# EAGLE board boardEagle (EAGLE 6.4)
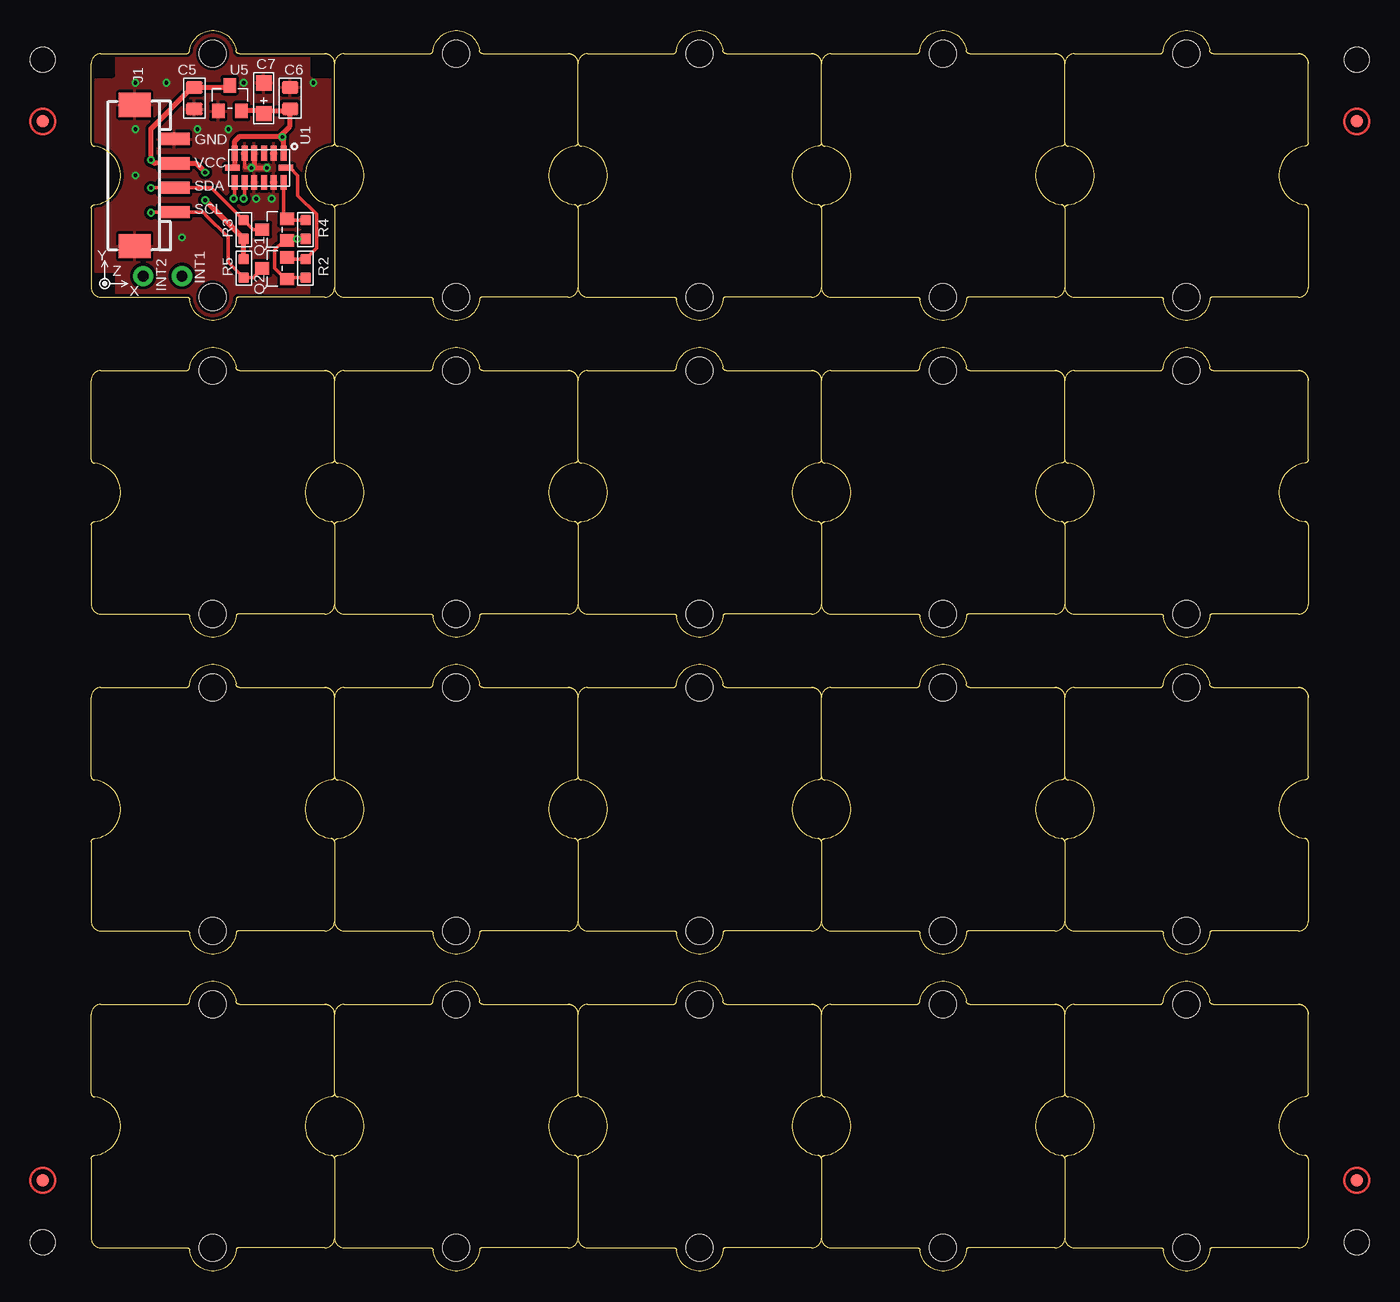
[diagram p0: board, top side]
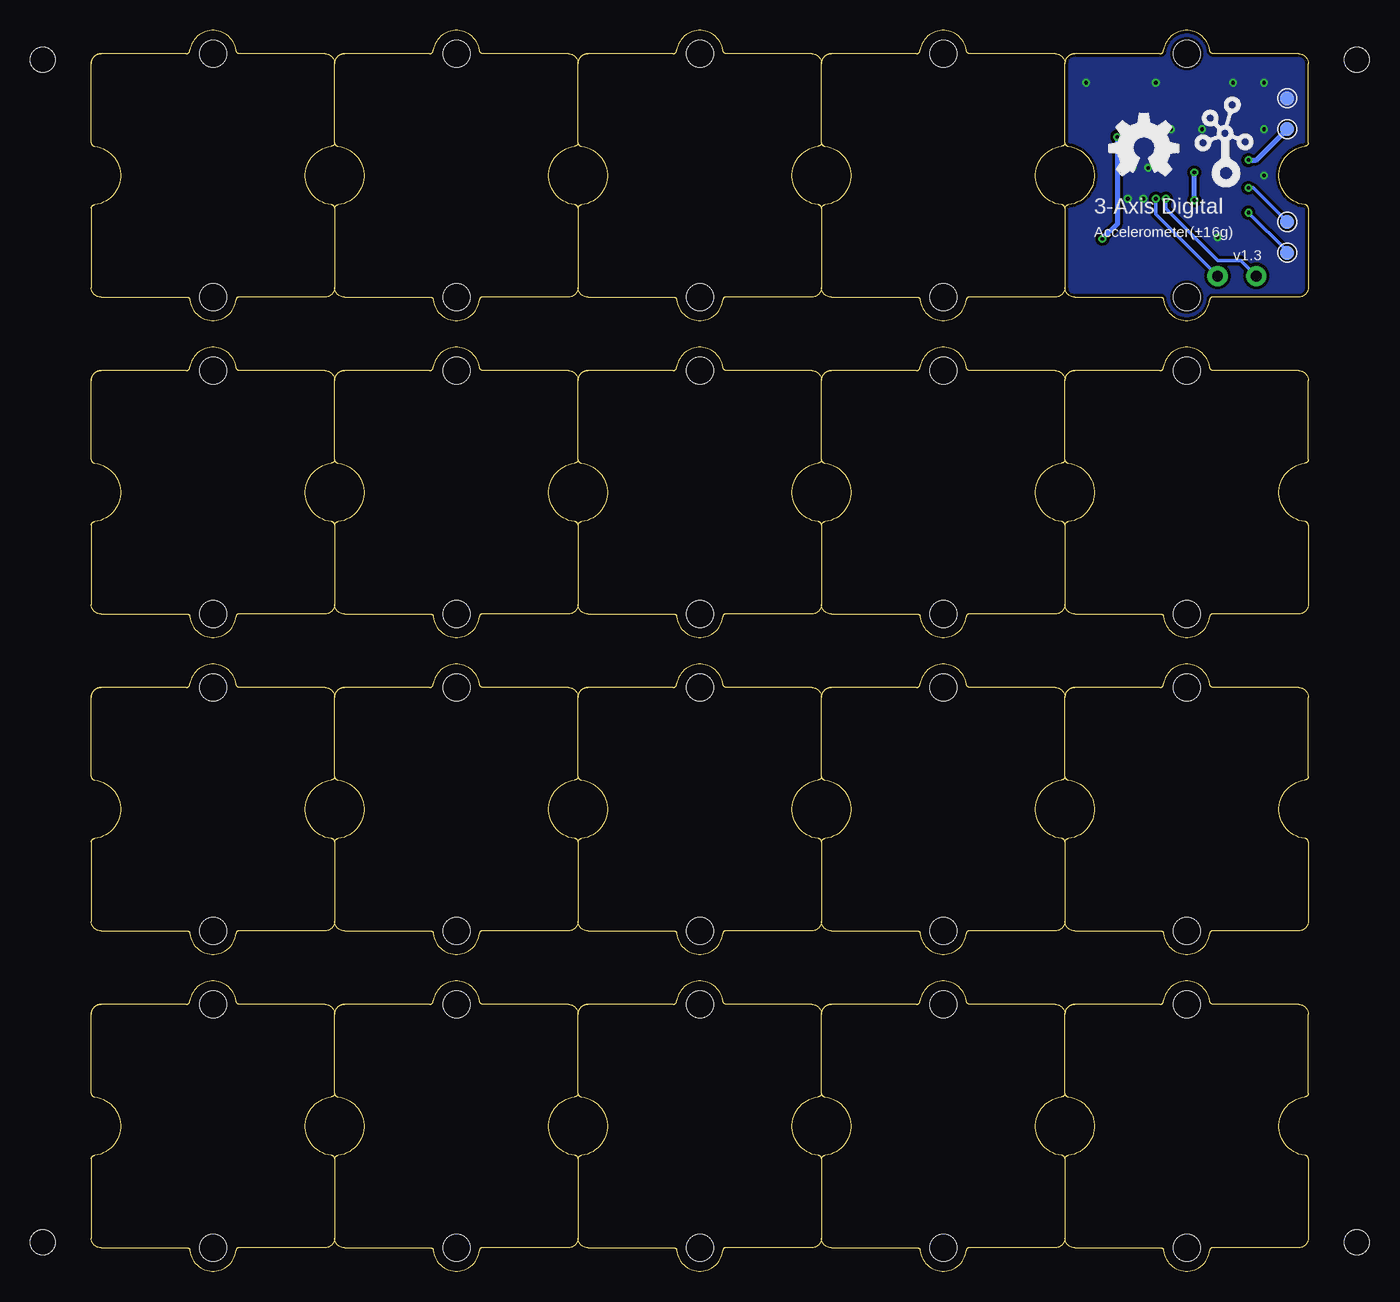
[diagram p1: board, bottom side, seen from below]

Size 100 x 101.93 mm. Coordinates in mm from the lower left corner, seen from the top.
Copper layers (1*16): Top 0.035mm / dielectric 1.5mm / Bottom 0.035mm
Design rules "SeeedStudio_2layer_DRU_no_angle_20140221 *": minimum track width 6mil, minimum drill 12mil, track to track 6mil, track to pad 6mil, pad to pad 6mil, via to via 6mil, smd to smd 0mil, copper to edge 10mil, drill to drill 10mil, minimum pad ring 10mil, minimum via ring 6mil, stop-mask expansion 2mil, vias tented up to drill 100mil, thermal gap 10mil
Holes 2.03 mm at -3.97,2.38 -3.97,99.54 103.98,99.54 103.98,2.38
tRestrict: area 12.9,91.4 to 13.1,92.3

## Footprints (pad centres in the part's own frame; a part is rotated, then mirrored left to right if it is on the bottom)
C0805 = smd 1.016 x 1.397: 1 -0.889,0; 2 0.889,0
AVX-A = smd 1.27 x 1.27: + -1.27,0; - 1.27,0
4P-SMD-2.0 = smd 1 x 2.54: 1 -3,0; 2 -1,0; 3 1,0; 4 3,0 | smd 2 x 2.6: SS1 -5.8,3.25; SS2 5.8,3.25
ROUND-MARK-1.0 = smd 1.016 x 1.016: P$1 0,0
1P-65/35MIL = drill 0.889 pad 1.651: 1 0,0
SOT23 = smd 1.016 x 1.143: 1 -0.889,-1.016; 2 0.889,-1.016; 3 0,1.016
R0603 = smd 0.889 x 0.889: 1 -0.762,0; 2 0.762,0
TP_4545 = smd 1.143 x 1.143: T 0,0
LGA14 = smd 1.2 x 0.5: 1 -1.2,2; 2 -1.2,1.2; 3 -1.2,0.4; 4 -1.2,-0.4; 5 -1.2,-1.2; 6 -1.2,-2; 8 1.2,-2; 9 1.2,-1.2; 10 1.2,-0.4; 11 1.2,0.4; 12 1.2,1.2; 13 1.2,2 | smd 0.5 x 1.2: 7 0,-2.2; 14 0,2.2
SOT23' = smd 1.016 x 1.2: 1 -0.95,-1.06; 2 0.95,-1.06; 3 0,1.06
1U-DIM-W/-DRILL = hole 2.2: 0,-10; 0,10

## Placement (x,y rotation side)
C5  10uF  [C0805]  8.48,96.36 270 top
C6  10uF  [C0805]  16.35,96.36 270 top
C7  DNP  [AVX-A]  14.19,96.36 90 top
J1  SMD Grove  [4P-SMD-2.0]  6.83,90.01 90 top
P1  [ROUND-MARK-1.0]  -3.97,7.46 0 top  (outside the outline)
P2  DNP  [1P-65/35MIL]  4.29,81.76 270 top
P3  DNP  [1P-65/35MIL]  7.46,81.76 270 top
P4  [ROUND-MARK-1.0]  103.98,7.46 0 top  (outside the outline)
P5  [ROUND-MARK-1.0]  103.98,94.46 0 top  (outside the outline)
P6  [ROUND-MARK-1.0]  -3.97,94.46 0 top  (outside the outline)
Q1  2N7002  [SOT23]  15.08,85.57 90 top
Q2  2N7002  [SOT23]  15.08,82.39 90 top
R2  4.7K  [R0603]  17.62,85.57 270 top
R3  4.7K  [R0603]  12.54,85.57 270 top
R4  4.7K  [R0603]  17.62,82.39 270 top
R5  4.7K  [R0603]  12.54,82.39 90 top
TP1  [TP_4545]  1.74,96.36 0 bottom
TP2  [TP_4545]  1.74,93.82 0 bottom
TP3  [TP_4545]  1.74,86.2 0 bottom
TP4  [TP_4545]  1.74,83.66 0 bottom
U1  ADXL345  [LGA14]  13.81,90.65 270 top
U5  XC6206P252MR-G  [SOT23']  11.4,96.36 0 top
U$1  [OSHW_FILLX200_NOTEXT]  16.35,90.01 0 bottom
U$3  [TWIGLOGO]  6.83,90.01 0 bottom
U$4  [1U-DIM-W/-DRILL]  10,90.01 0 top
U$5  [1U-DIM-W/-DRILL]  30,90.01 0 top
U$6  [1U-DIM-W/-DRILL]  50,90.01 0 top
U$7  [1U-DIM-W/-DRILL]  70,90.01 0 top
U$8  [1U-DIM-W/-DRILL]  90,90.01 0 top
U$9  [1U-DIM-W/-DRILL]  10,63.98 0 top
U$10  [1U-DIM-W/-DRILL]  30,63.98 0 top
U$11  [1U-DIM-W/-DRILL]  50,63.98 0 top
U$12  [1U-DIM-W/-DRILL]  70,63.98 0 top
U$13  [1U-DIM-W/-DRILL]  90,63.98 0 top
U$14  [1U-DIM-W/-DRILL]  10,37.94 0 top
U$15  [1U-DIM-W/-DRILL]  30,37.94 0 top
U$16  [1U-DIM-W/-DRILL]  50,37.94 0 top
U$17  [1U-DIM-W/-DRILL]  70,37.94 0 top
U$18  [1U-DIM-W/-DRILL]  90,37.94 0 top
U$19  [1U-DIM-W/-DRILL]  10,11.91 0 top
U$20  [1U-DIM-W/-DRILL]  30,11.91 0 top
U$21  [1U-DIM-W/-DRILL]  50,11.91 0 top
U$22  [1U-DIM-W/-DRILL]  70,11.91 0 top
U$23  [1U-DIM-W/-DRILL]  90,11.91 0 top

## Library data of the parts
C5-C7 P2 P3 Q1 Q2 R2-R5 = Discrete
J1 = Connector
P1 P4-P6 TP1-TP4 = Discrete; PARTNO: DNP
U1 U5 = IC
U$1 U$3 = Logo
U$4-U$23 = moudle

## Nets
2V5: C6.2 C7.+ Q1.1 Q2.1 R2.2 R4.2 U1.1 U1.6 U1.7 U5.2
GND: C5.2 C6.1 C7.- J1.4 J1.SS1 J1.SS2 TP1.T U1.2 U1.4 U1.5 U1.10 U1.12 U5.1
INT1: P2.1 U1.8
INT2: P3.1 U1.9
SCL: J1.1 Q2.3 R5.1 TP4.T
SCL1: Q2.2 R4.1 U1.14
SDA: J1.2 Q1.3 R3.1 TP3.T
SDA1: Q1.2 R2.1 U1.13
VCC: C5.1 J1.3 R3.2 R5.2 TP2.T U5.3

## Tracks (layer width: path | path; a pad name or v marks a point on that pad's centre or on a via)
2V5  (via drill 0.3 pad 0.64)
  Top 0.203: U5.2 12.54,95.3 12.54,95.35 | C7.+ 14.45,95.09 14.45,95.35 | 13.81,95.35 14.06,95.35
  Top 0.305: R2.2 v16.92,84.81 16.1,84.81 | R4.2 16.22,81.63 Q2.1 | 15.97,81.5 15.08,82.39 15.08,83.92 15.84,84.68 15.97,84.68 Q1.1
  Top 0.406: 15.81,93.54 U1.1 15.81,93.09 v15.71,93.19 15.46,93.19 | 13.81,95.35 12.54,95.35 12.26,95.35 | 15.46,93.19 12.16,93.19 11.81,92.84 U1.6 11.81,90.74 11.9,90.65 U1.7 | 15.81,93.54 15.46,93.19 | 15.46,93.19 15.71,92.93 | Q2.1 15.97,81.5 | 15.84,84.93 15.97,84.81 | 15.97,84.81 15.97,84.68 | 15.97,84.81 16.1,84.81 | 14.06,95.35 14.45,95.35 16.35,95.35 C6.2 16.35,94.08 15.81,93.54
  Bottom 0.406: v15.71,93.19 15.71,86.01 v16.92,84.81
GND  (via drill 0.3 pad 0.64)
  Top 0.305: U1.5 12.61,90.71 12.67,90.65 v13.18,90.65
  Top 0.406: v13.18,90.65 13.43,90.65 | 13.43,90.65 v14.45,90.65 | U1.4 13.41,90.67 13.43,90.65
  other vias: 13.56,88.11 14.83,88.11 12.54,97.63 18.26,97.63 8.73,93.82 11.27,93.82 6.19,97.63 3.65,97.63 3.65,93.82 3.65,90.01 7.46,84.93
  pour Bottom (isolate 0.254): -0.79,102.71 20.8,102.71 20.8,77.31 -0.79,77.31
  pour Top (isolate 0.254): -0.79,102.71 20.8,102.71 20.8,77.31 -0.79,77.31
INT1  (via drill 0.3 pad 0.64)
  Top 0.305: U1.8 11.81,88.2 v11.71,88.11
  Bottom 0.305: v11.71,88.11 11.71,87.28 7.46,83.03 5.55,83.03 P2.1
INT2  (via drill 0.3 pad 0.64)
  Top 0.305: U1.9 12.61,88.18 v12.54,88.11
  Bottom 0.305: v12.54,88.11 12.54,86.84 P3.1
SCL  (via drill 0.3 pad 0.64)
  Top 0.305: Q2.3 13.3,81.63 R5.1 11.27,82.9 11.27,84.93 9.43,86.77 9.37,86.84 9.19,87.01 J1.1 4.97,87.01 v4.92,86.97
  Bottom 0.305: TP4.T 1.74,83.79 v4.92,86.97
SCL1
  Top 0.305: Q2.2 16.22,83.16 R4.1 18.51,84.04 18.51,86.84 16.98,88.36 16.98,90.01 16.35,90.65 U1.14
SDA  (via drill 0.3 pad 0.64)
  Top 0.305: v4.92,89 4.94,89.01 J1.2 9.86,89.01 R3.1 13.3,85.57 Q1.3
  Bottom 0.305: v4.92,89 4.54,89 TP3.T
SDA1
  Top 0.305: U1.13 15.81,86.49 15.97,86.33 | R2.1 16.22,86.33 Q1.2
  Top 0.406: Q1.2 15.97,86.33
VCC  (via drill 0.3 pad 0.64)
  Top 0.203: 11.4,97.25 U5.3
  Top 0.406: R5.2 R3.2 v9.37,87.98 | v9.37,90.27 8.62,91.01 J1.3 5.19,91.01 v4.92,91.28 4.92,93.87 8.17,97.13 8.48,97.13 C5.1 11.4,97.25
  Bottom 0.406: v4.92,91.28 4.29,91.28 TP2.T | v9.37,87.98 v9.37,90.27

## Text on the board
tPlace: GND | VCC | SDA | SCL
bPlace: 3-Axis Digital | Accelerometer(±16g) | v1.3
tNames: Y | Z | INT1 | X | INT2